# Altium PCB MiniAB-Board.pcbdoc
Units mil, origin at the board's own origin, x right, y up, seen from the top; angles counter-clockwise.
Board outline 2008.59 x 1417.04 mil, 2 copper layers (Top Layer, Bottom Layer); 14 components, 27 nets, 54 pads, 16 vias.
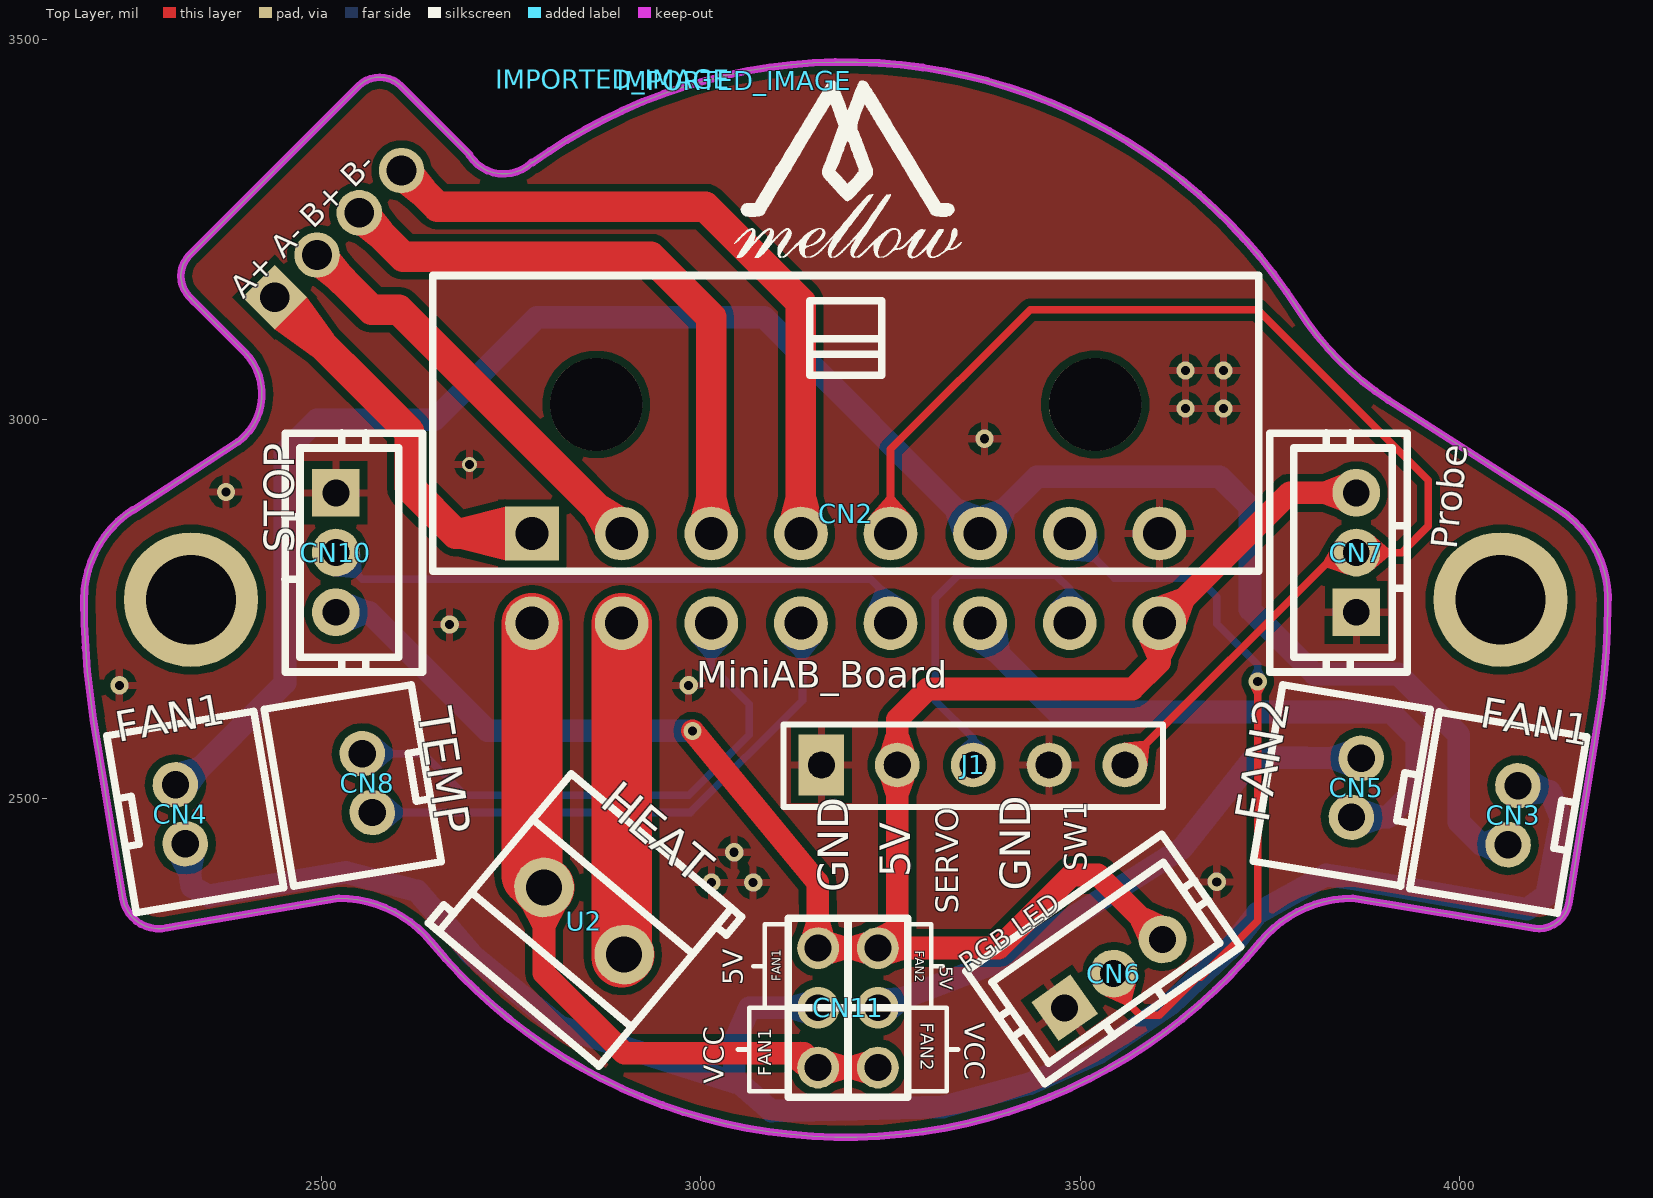
[diagram p0: Top Layer view]
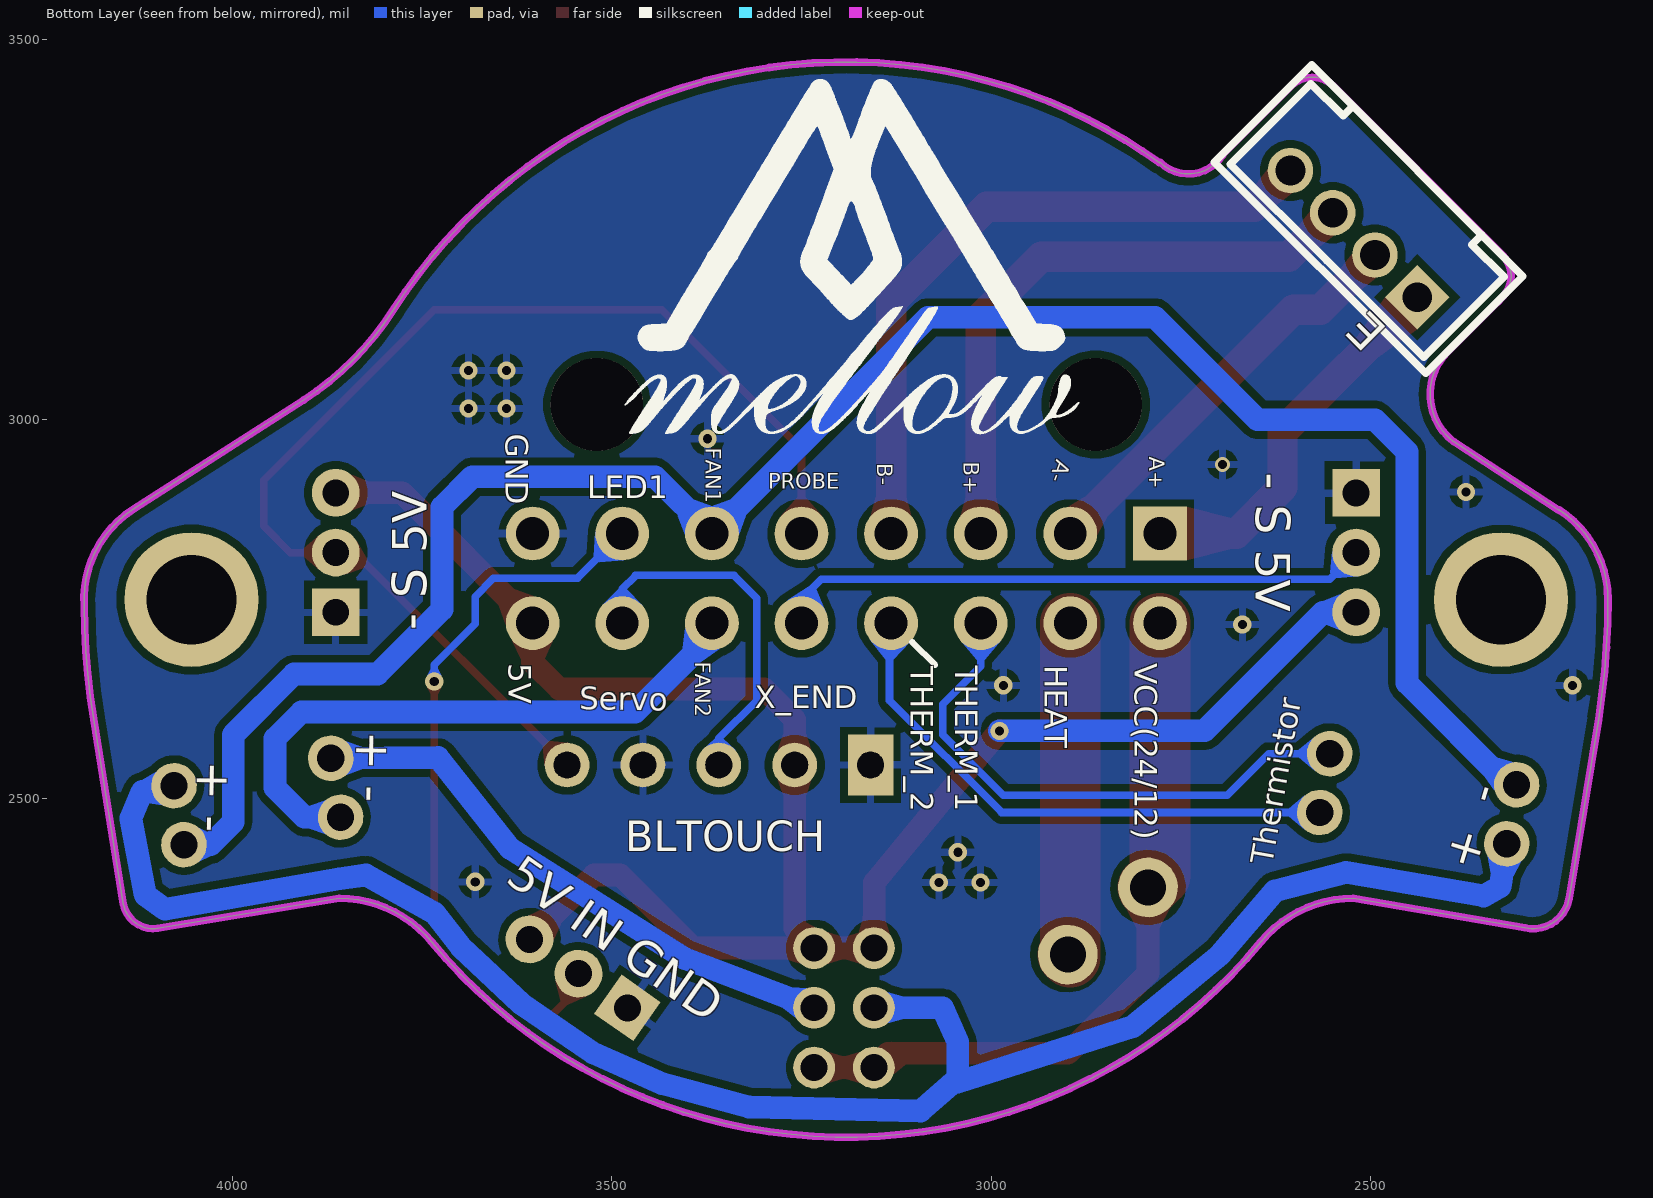
[diagram p1: Bottom Layer view, seen from below]

## Layer stack, top to bottom
Top Solder: solder mask 0.4, Solder Resist, Dk 3.5
Top Layer: signal copper 1.4
Dielectric1: dielectric 12.6, FR-4, Dk 4.8
Bottom Layer: signal copper 1.4
Bottom Solder: solder mask 0.4, Solder Resist, Dk 3.5

## Board outline
2238.25,2368.3 2199.48,2604.62 cw(c3191.01,2761.98) 2187.07,2762 cw(c2328,2762.01) 2251.59,2880.43 2252,2880 2390,2970 2391.18,2970.64 ccw(c2342.79,3032.76) 2398.46,3088.44 2332.67,3153.88 2326.29,3160.61 cw(c2354.13,3188.45) 2326.29,3216.29 2549,3439 cw(c2576.84,3411.16) 2604.68,3439 2695.57,3348.1 2695.12,3347.82 ccw(c2740,3376) 2777.45,3338.49 2778.14,3337.8 cw(c3190,2762) 2896,3406 2896.98,3406.79 cw(c3191,2762) 3788.03,3143.77 ccw(c4119.7,3355.89) 3906.27,3025.06 4130.84,2881.1 cw(c4053.99,2762) 4195.51,2754.13 cw(c3191.03,2762) 4183.12,2604.52 4143.75,2360.43 cw(c4104.03,2368.73) 4098.3,2328.56 3859.13,2368.3 ccw(c3859.13,2210.82) 3737.65,2311.03 cw(c3191,2762) 2644.35,2311.03 ccw(c2522.87,2210.82) 2522.87,2368.3 2296.46,2329.31 cw(c2285.92,2376.52)

## Design rules (kind name [scope] priority, off if disabled: settings)
Clearance [All] p1: gap=10 ignorepadtopadclearanceinfootprint=FALSE except(0: Arc-Hole Track-Hole SMDPad-Hole THPad-Hole Via-Hole Fill-Hole Poly-Hole Region-Hole Text-Hole)
PolygonConnect [All] p1: connectstyle=Relief reliefconductorwidth=10 reliefentries=4 polygonreliefangle="90 Angle" airgapwidth=10
RoutingVias [All] p1: holewidth=28 width=50 viastyle="Through Hole" minholewidth=28 minwidth=50 maxholewidth=28 maxwidth=50
SolderMaskExpansion [All] p1: expansion=4 istentingtop=FALSE
Width [All] p1: maxlimit=10 minlimit=10 preferedwidth=10
30 further rules are at their usual default settings.

## Components (designator, comment, footprint, x,y, rotation, side; value= is the part's Value field where it differs from the comment)
CN2 "M3025R-2X8P" CONN-TH_M3025R-2X8P 3190.97,2789.99 r180 top
CN3 "PH-2AK" CONN-TH_PH-2A 4070.49,2477.81 r80.5 top
CN4 "PH-2AK" CONN-TH_PH-2A 2314,2479 r279.5 top
CN5 "PH-2AK" CONN-TH_PH-2A 3864,2514 r80.5 top
CN6 "PH-3A" CONN-TH_3P-P2.00_PH-3AK 3544,2269 r35 top
CN7 "PH-3A" CONN-TH_3P-P2.00_PH-3AK 3863.96,2824 r90 top
CN8 "PH-2AK" CONN-TH_PH-2A 2560.45,2520.2 r99.5 top
CN10 "PH-3A" CONN-TH_3P-P2.00_PH-3AK 2518.96,2824 r270 top
CN11 "A2005WV-2X3P COPY" HDR-TH_6P-P2.00-V-M-R2-C3-S2.00 3194,2224 r90 top
E "PH-4AK" CONN-TH_PH-4AK 2522,3244 r225 bottom
IMPORTED_IMAGE "Comment" IMPORTED_IMAGE 2884.24,3447.72 r0 top
IMPORTED_IMAGE "Comment" IMPORTED_IMAGE 3044.21,3445.87 r0 top
J1 "2.54-5P单排直针" ? 3159,2544 r0 top
U2 "KF350-3.5-2P" CONN-TH_P3.50_KF350-3.5-2P 2846.2,2338.3 r320 top

## Footprints (in the part's own frame and the unit in brackets; to place one, negate y for a bottom-side part, rotate by r counter-clockwise, add the part's x,y. Pads: shape width x height; smd on the part's side, far side on the other; paste and mask are expansions set on the pad)
CONN-TH_3P-P2.00_PH-3AK [mm]
  rect 1.6x1.6 hole 0.9: 1(-2,0)
  round 1.6 hole 0.9: 2(0,0) 3(2,0)
  silkscreen extent -4.01,-1.71 4.01,2.9
CONN-TH_M3025R-2X8P [mm]
  rect 1.8x1.8 hole 1.1: 1(10.5,-1.5)
  round 1.8 hole 1.1: 2(7.5,-1.5) 3(4.5,-1.5) 4(1.5,-1.5) 5(-1.5,-1.5) 6(-4.5,-1.5) 7(-7.5,-1.5) 8(-10.5,-1.5) 9(10.5,1.5) 10(7.5,1.5) 11(4.5,1.5) 12(1.5,1.5) 13(-1.5,1.5) 14(-4.5,1.5) 15(-7.5,1.5) 16(-10.5,1.5)
  round 3.1 hole 3.1 unplated: ""(-8.35,-5.82) ""(8.35,-5.82)
  silkscreen extent -13.83,-10.14 13.83,-0.24
CONN-TH_P3.50_KF350-3.5-2P [mm]
  round 2 hole 1.2: 1(-1.75,0) 2(1.75,0)
  silkscreen extent -3.95,-3.4 3.95,3.5
CONN-TH_PH-2A [mil]
  round 60 hole 36: 1(-39.35,0) 2(39.35,0)
  silkscreen extent -118,-79 118,118
CONN-TH_PH-4AK [mil]
  rect 60x60 hole 39.37: 1(118.11,0)
  round 60 hole 39.37: 2(39.37,0) 3(-39.37,0) 4(-118.11,0)
  silkscreen extent -197,-63 197,118
HDR-TH_6P-P2.00-V-M-R2-C3-S2.00 [mm]
  round 1.4 hole 0.9: 1(-2,-1) 2(-2,1) 3(0,-1) 4(0,1) 5(2,-1) 6(2,1)
  silkscreen extent -3,-2 3,2
IMPORTED_IMAGE [mil]
? [mm]
  rect 1.524x2.032 hole 0.889 slot 0.894 at 90 deg: 1(0,0)
  round 1.5 hole 0.889 slot 0.894 at 0 deg: 2(2.54,0) 3(5.08,0) 4(7.62,0) 5(10.16,0)
  silkscreen extent -1.27,-1.41 11.43,1.36

## Free pads (board coordinates)
  round 177.16 hole 118.11: 3(2328.02,2761.91) 3(4054,2761.91)

## Via types
v1: diameter 24, hole 12, Top Layer to Bottom Layer, 15 vias
v2: diameter 19.68, hole 11.81, Top Layer to Bottom Layer, tented both sides, 1 vias

## Nets (pads, with @x,y where several pads share a name; then routed paths per layer and width w, separated by ;. In a path a pad name is that pad's centre, name@x,y a point inside that pad or via, vN(x,y) a via of type N, cw(c..) or ccw(c..) an arc to the next point about the centre after c; other vN are vias at no path point)
5V: CN2.16 CN6.3 CN7.3 CN10.3 CN11.5 CN11.6 J1.2 | length 2480
  Top Layer w30: v1(2989,2589) 3154,2389 CN11.6 ; CN11.6 CN11.5 ; CN6.3 3523.66,2399 3489,2399 3392.74,2302.74 CN11.5 ; CN7.3 3776.2,2902.7 CN2.16 3604.4,2679.4 3569,2644 3299,2644 3259,2604 J1.2 3259,2328.37 CN11.5
  Bottom Layer w30: CN10.3 2562.7,2745.3 2719,2589 v1(2989,2589)
A+: CN2.1 E.1 | length 510.9
  Top Layer w40: E.1 2616,2983 2616,2910 2677,2849 CN2.1
A-: CN2.2 E.2 | length 554.3
  Top Layer w40: E.2 2566.32,3144 2602,3144 2895.7,2850.3 CN2.2
B+: CN2.3 E.3 | length 806.2
  Top Layer w40: E.3 2607.68,3214 2934,3214 3013.8,3134.2 CN2.3
B-: CN2.4 E.4 | length 903.3
  Top Layer w40: E.4 2653.04,3280 3006,3280 3131.92,3154.08 CN2.4
FAN1: CN2.6 CN3.1 CN4.1 | length 2686.9
  Bottom Layer w30: CN4.1 2317.8,2517.8 2452,2652 2452,2957 2494,2999 2649,2999 2784,3134 3083.2,3134 CN2.6 3443.1,2924 3684,2924 3724,2884 3724,2749 3809,2664 3919,2664 3999,2584 3999,2469 4029,2439 CN3.1
FAN1_S: CN3.2 CN4.2 CN11.4 | length 2431
  Bottom Layer w30: CN4.2 2329,2384 2351.1,2371.4 2532.7,2402.5 2626.4,2377.8 2698.2,2294.1 2813.1,2199.4 3044,2125.9 ; CN11.4 3064,2224 3044,2179 3044,2130.9 3093.1,2088 3319.2,2093.1 3434,2124 3524,2164 3619,2229 3699,2304 3734,2349 3824,2399 3859,2394 4089,2354 4115,2372.6 4134,2474 4119,2509 CN3.2
FAN2: CN2.14 CN5.1 | length 815.8
  Bottom Layer w30: CN2.14 3368.1,2714.9 3469,2614 3909,2614 3944,2579 3944,2514 3905.2,2475.2 CN5.1
FAN2_S: CN5.2 CN11.3 | length 749
  Bottom Layer w30: CN11.3 3404,2289 3634,2434 3729,2554 CN5.2
GND: CN2.8 CN6.1 CN7.1 CN10.1 J1.1 J1.4
  other v1: 3014,2389 3069,2389 3680,2390 3044,2429 2234,2649 2984,2649 2669,2729 2374,2904 3374,2974 3639,3014 3689,3014 3639,3064 3689,3064
  other v2: 2695,2940
HEAT_GND: CN2.10 U2.2 | length 444.9
  Top Layer w80: CN2.10 2895.7,2290.7 U2.2
LED1: CN2.7 CN6.2 | length 953.8
  Top Layer w10: CN6.2 3544,2249 3579,2214 3604,2214 3654,2264 3659,2264 3734,2339 v1(3734,2654)
  Bottom Layer w10: CN2.7@3486.25,2849.04 3545.29,2790 3656,2790 3680,2766 3680,2730 3734,2676 v1(3734,2654)
S$6483: 
S$6489: 
S$6589: 
S$9736: 
S$9868: 
S$9889: 
S$9932: 
S$9934: 
S$10107: 
SERVO: CN2.15 J1.3 | length 483.3
  Bottom Layer w10: J1.3 3359,2579 3309,2629 3309,2764 3339,2794 3469,2794 3469,2793 3486,2776 CN2.15
SW1: CN2.5 CN7.2 J1.5 | length 1579.9
  Top Layer w10: CN2.5 3250,2960 3434,3144 3734,3144 3959,2919 3959,2859 3924,2824 3839,2824 J1.5
SW2: CN2.13 CN10.2 | length 788.4
  Bottom Layer w10: CN10.2 2554,2789 3224,2789 3250,2763 CN2.13
THERM_1: CN2.11 CN8.2 | length 753.8
  Bottom Layer w10: CN8.2 2634,2559 2689,2504 2984,2504 3064,2584 3064,2624 3013.8,2674.2 CN2.11 CN2.11@3034,2730.9
THERM_2: CN2.12 CN8.1 | length 731
  Bottom Layer w10: CN8.1 2986.4,2481.4 3134,2629 3134,2728.9 CN2.12
VCC: CN2.9 CN11.1 CN11.2 U2.1 | length 959.4
  Top Layer w30: U2.1 2793.4,2269.6 2899,2164 3135.89,2164 CN11.2 ; CN11.2 CN11.2 ; CN11.1 CN11.2
  Top Layer w80: CN2.9 2777.59,2398.42 U2.1
pads on no net: CN2.

## Polygon pours and split planes (outlines as drawn)
GND on Bottom Layer "Bottom Layer-GND" (solid, remove dead copper, pour order 0): 1982,3732 4536,3732 4538,3734 4538,1824 1992,1824 1982,1834
GND on Top Layer "Top Layer-GND" (solid, remove dead copper, pour order 1): 2086,3612 4370,3612 4374,3616 4374,1996 4372,1994 2090,1994 2086,1998

## Keep-outs
Keep-Out Layer:
  lines w10: 2199.48,2604.62 cw(c3191,2761.98) 2187.07,2762 cw(c2328,2762) 2251.59,2880.43 ; 2238.25,2368.3 ccw(c2285.92,2376.52) 2296.46,2329.31 ; 2326.29,3160.61 cw(c2354.13,3188.45) 2326.29,3216.29 ; 2391.18,2970.64 ccw(c2342.79,3032.76) 2398.46,3088.44 ; 2522.87,2368.3 cw(c2522.87,2210.82) 2644.35,2311.03 ccw(c3191,2762) 3737.65,2311.03 cw(c3859.13,2210.82) 3859.13,2368.3 ; 2549,3439 cw(c2576.84,3411.16) 2604.68,3439 ; 2695.12,3347.81 ccw(c2740,3376) 2777.45,3338.5 ; 2778.14,3337.8 cw(c3190,2762) 2896,3406 ; 2896.98,3406.79 cw(c3191,2762) 3788.03,3143.77 ccw(c4119.7,3355.89) 3906.27,3025.06 ; 4098.3,2328.56 ccw(c4104.03,2368.73) 4143.75,2360.43 ; 4130.84,2881.1 cw(c4053.99,2762) 4195.51,2754.13 cw(c3191,2762) 4183.12,2604.52

## Other copper
Top Layer:
  region net A-: 2492.28,3186.22 2524.1,3218.04 2537.18,3201.42 2508.9,3173.14
  region net B+: 2547.96,3241.9 2579.78,3273.72 2592.86,3257.1 2564.58,3228.82
  region net B-: 2603.64,3297.58 2635.46,3329.4 2648.54,3312.78 2620.26,3284.5
  region net 5V: 3281.15,2524.47 3236.85,2524.47 3244,2503.8 3274,2503.8
  region net 5V: 3281.15,2563.53 3236.85,2563.53 3244,2584.2 3274,2584.2
  region net SW1: 3557.15,2573.47 3588.47,2542.15 3590.96,2568.89 3583.89,2575.96
  region net 5V: 3175.16,2321.13 3133.82,2320.81 3139.34,2340.14 3169.34,2340.38
  region net 5V: 3172.86,2282.07 3172.86,2323.41 3192.15,2317.74 3192.15,2287.74
  region net 5V: 3231.64,2330.25 3260.88,2301.01 3269.61,2317.76 3248.39,2338.98
  region net 5V: 3215.14,2282.07 3215.14,2323.41 3195.85,2317.74 3195.85,2287.74
  region net 5V: 3251.6,2282.07 3251.6,2323.41 3270.89,2317.74 3270.89,2287.74
  region net VCC: 3172.86,2124.59 3172.86,2165.93 3192.15,2160.26 3192.15,2130.26
  region net VCC: 3149.16,2172.27 3128.51,2136.46 3113.48,2149 3130.77,2179
  region net VCC: 3215.14,2124.59 3215.14,2165.93 3195.85,2160.26 3195.85,2130.26
  region net VCC: 2822.94,2356.52 2763.89,2356.56 2778.4,2328.99 2808.4,2328.97
  region net A-: 2898.57,2884.36 2860.3,2847.47 2847.82,2869.89 2876.63,2897.65
  region net B+: 3040.38,2872.48 2987.23,2872.47 2993.8,2897.27 3033.8,2897.28
  region net B-: 3158.49,2872.48 3105.35,2872.48 3111.92,2897.28 3151.92,2897.28
  region net SW1: 3276.59,2872.49 3223.44,2872.46 3245,2897.28 3255,2897.28
  region net 5V: 3602.18,2766.3 3639.72,2728.67 3649.1,2754.39 3627.91,2775.62
  region net 5V: 3630.95,2707.52 3577.8,2707.47 3589.4,2682.68 3619.4,2682.7
  region net 5V: 3843.15,2879.1 3843.11,2926.34 3821.07,2917.7 3821.09,2887.7
  region net SW1: 3884.79,2800.38 3884.79,2847.62 3906.84,2829 3906.84,2819
  region net SW1: 3852.82,2794.54 3836.12,2838.74 3821.91,2813.98 3825.79,2803.72
  region net 5V: 3577.07,2312.19 3610.47,2345.6 3588.79,2355.09 3567.57,2333.88
  region net LED1: 3574.33,2260.49 3531.77,2239.98 3557.85,2228.08 3567.39,2232.68
  region net LED1: 3725,2646.06 3743,2646.06 3739,2637.66 3729,2637.66
  region net A+: 2438.5,3118.1 2480.9,3160.5 2516.25,3111 2487.96,3082.71
  region net A+: 2742.16,2813.61 2742.16,2884.47 2682.16,2869 2682.16,2829
Bottom Layer:
  region net SERVO: 3381.15,2563.53 3336.85,2563.53 3354,2579 3364,2579
  region net FAN1_S: 3136.4,2203.33 3136.4,2244.67 3117.11,2239 3117.11,2209
  region net FAN2_S: 3257.76,2211.17 3243.05,2249.8 3263.09,2251.37 3273.77,2223.34
  region net FAN1: 2336.64,2510.62 2311,2547.61 2332.39,2553.61 2349.76,2528.55
  region net FAN1_S: 2301.22,2417.2 2345.71,2423.94 2341.44,2402.05 2311.78,2397.56
  region net FAN2: 3877.36,2452.69 3877.35,2497.69 3898.35,2490.2 3898.36,2460.2
  region net FAN2_S: 3850.84,2575.48 3850.46,2530.48 3829.52,2538.15 3829.77,2568.15
  region net THERM_2: 2586.8,2458.89 2586.79,2503.89 2607.79,2486.4 2607.79,2476.4
  region net THERM_1: 2573.81,2581.51 2573.8,2536.51 2594.8,2554 2594.81,2564
  region net FAN1: 3332.78,2846.82 3370.36,2884.4 3344.64,2893.76 3323.42,2872.54
  region net FAN1: 3365.92,2884.4 3403.5,2846.82 3412.86,2872.54 3391.64,2893.76
  region net LED1: 3484.03,2813.68 3521.61,2851.26 3523.9,2818.46 3516.83,2811.39
  region net THERM_2: 3106.38,2706.37 3159.48,2708.66 3139,2682.95 3129,2682.52
  region net SW2: 3268.6,2761.11 3217.77,2745.58 3230.52,2775.41 3241.35,2778.72
  region net FAN2: 3403.03,2724.76 3357.65,2697.09 3380.08,2681.71 3406.43,2697.78
  region net SERVO: 3512.69,2754.52 3459.55,2754.22 3481,2775.97 3491,2776.03
  region net THERM_1: 3040.38,2707.48 2987.24,2707.51 3008.8,2682.69 3018.8,2682.69
  region net 5V: 2539.82,2721.66 2539.77,2768.9 2561.83,2760.3 2561.85,2730.3
  region net SW2: 2517.01,2792.56 2550.39,2825.99 2552.83,2797.24 2545.77,2790.16
  region net FAN1: 4044.16,2416.5 4044.16,2461.5 4029,2454 4029,2424
  region net FAN1_S: 4100.53,2535.22 4092.5,2490.94 4114.5,2494.57 4119.85,2524.09
  region net LED1: 3725,2661.94 3743,2661.94 3739,2670.34 3729,2670.34

## Silkscreen, mask and mechanical layers (free items; w line width, h text height)
Top Overlay:
  lines w6: 3049,2169 3064,2169 ; 3069,2279 3084,2279 ; 3114,2144 3114,2114 3064,2114 3064,2224 3084,2224 ; 3114,2224 3084,2224 ; 3114,2304 3114,2334 3084,2334 3084,2224 ; 3274,2144 3274,2114 3324,2114 3324,2224 3304,2224 ; 3274,2224 3304,2224 ; 3274,2304 3274,2334 3304,2334 3304,2224 ; 3304,2279 3319,2279 ; 3324,2169 3339,2169
  lines w10: 3114,2224 3274,2224
  text "A+ A- B+ B-" at 2396.61,3157.39 h30 r45
  text "Probe" at 3996.4,2827.17 h35 r84
  text "STOP" at 2464,2824 h40 r90
  text "MiniAB_Board" at 2994,2634 h60
  text "TEMP" at 2626.78,2615.48 h45 r279
  text "FAN1" at 4025.53,2594.3 h40 r350
  text "FAN1" at 2232.47,2574.3 h40 r10
  text "HEAT" at 2864.54,2491.76 h45 r320
  text "FAN2" at 3748.16,2466.09 h45 r80
  text "SW1" at 3509,2404 h30 r90
  text "5V" at 3276,2396 h40 r90
  text "GND" at 3434,2378 h40 r90
  text "GND" at 3194,2376 h40 r90
  text "SERVO" at 3339,2348 h30 r90
  text "FAN2" at 3279,2299 h20 r270
  text "5V" at 3309,2279 h30 r270
  text "RGB LED" at 3351.17,2269.76 h25 r35
  text "FAN1" at 3109,2259 h20 r90
  text "5V" at 3064,2254 h45 r90
  text "FAN2" at 3284,2204 h30 r270
  text "VCC" at 3339,2204 h45 r270
  text "FAN1" at 3099,2134 h30 r90
  text "VCC" at 3039,2124 h45 r90
Bottom Overlay:
  lines w8: 3074,2676 3104,2706
  text "GND" at 3639.71,2980.29 h30 r90
  text "FAN1" at 3376,2962 h20 r90
  text "A+" at 2792,2950 h20 r90
  text "A-" at 2913.4,2947.42 h20 r110
  text "B+" at 3036,2944 h20 r90
  text "B-" at 3150,2942 h20 r90
  text "- S 5V" at 2651.5,2929 h45 r90
  text "PROBE" at 3294,2908 h20
  text "LED1" at 3532.23,2895.38 h30
  text "- S 5V" at 3743.78,2721.46 h45 r270
  text "FAN2" at 3390.06,2680.29 h20 r90
  text "VCC(24/12)" at 2811,2678 h30 r90
  text "5V" at 3635.71,2678.29 h30 r90
  text "HEAT" at 2929.11,2675.5 h30 r90
  text "THERM_1" at 3047.41,2674.89 h30 r90
  text "THERM_2" at 3105.71,2674.29 h30 r90
  text "X_END" at 3311.91,2618.86 h30
  text "Servo" at 3543.1,2617.38 h30 r1
  text "+ -" at 3836.5,2589.39 h45 r91
  text "+ -" at 4046.5,2549.39 h45 r91
  text "BLTOUCH" at 3482,2430 h40
  text "Thermistor" at 2629.23,2411.4 h30 r280
  text "+  -" at 2362.48,2402.42 h45 r287
  text "5V IN GND" at 3641.91,2390.57 h45 r35
Document:
  lines w8: 1504,2385.1 1704,2385.1 ; 1696.55,3462 1696.55,3656 ; 1724,2386.4 1924,2386.4 ; 1726,2857.6 1922,2857.6 ; 1726,3022.4 1922,3022.4 ; 1768,3656 1512,3656 1512,3462 2368,3462 2368,3652 1770,3656 ; 1907.07,3462 1907.07,3655.08 ; 2125.52,3462 2125.52,3653.62 ; 2202,4108.8 4194,4108.8 ; 2202,4391 2202,3823 4194,3823 4194,4393 2202,4393 ; 2431.7,3823 2431.7,4393 ; 2673.81,3823 2673.81,4393 ; 2744,1504 2744,1704 ; 2918.54,3823 2918.54,4393 ; 3171.72,3823 3171.72,4393 ; 3204,1764 3204,1934 ; 3374,1764 3374,1934 ; 3426.44,3823 3426.44,4393 ; 3564,1764 3564,1934 ; 3614,1504 3614,1700 ; 3689.6,3823 3689.6,4393 ; 3744,1764 3744,1934 ; 3864,1504 3864,1700 ; 3936.97,3823 3936.97,4393 ; 4464,2396.39 4664,2396.39 ; 4466,2867.6 4662,2867.6 ; 4466,3032.41 4662,3032.41 ; 4684,2395.06 4884,2395.06 ; 1504,2244 1704,2244 1704,2544 1504,2544 1504,2244 ; 1724,2244 1924,2244 1924,2544 1724,2544 1724,2244 ; 1726,2692 1922,2692 1922,3176 1898,3176 1726,3176 1726,2692 ; 2594,1504 2894,1504 2894,1704 2594,1704 2594,1504 ; 3054,1764 3924,1764 3924,1934 3054,1934 3054,1764 ; 3424,1506 4004,1506 4004,1702 3424,1702 3424,1678 3424,1506 ; 4464,2254 4464,2554 4664,2554 4664,2254 4464,2254 ; 4466,2702 4466,3186 4490,3186 4662,3186 4662,2702 4466,2702 ; 4684,2254 4684,2554 4884,2554 4884,2254 4684,2254
  text "FAN1" at 3454,4219 h70
  text "LED1" at 3714,4216 h70
  text "SW1" at 3200,4215 h80
  text "A-" at 2460.32,4162.41 h80 r340
  text "A+" at 2248,4160 h80
  text "-" at 3564,4154 h80 r90
  text "GND" at 3962,4151 h80
  text "B-" at 2974,4150 h80
  text "B+" at 2730,4148 h80
  text "Neopixel" at 3704.35,4133 h40 r1
  text "Probe" at 3204,4124 h50
  text "Heat / GND" at 2472,3939 h60
  text "FAN2" at 3444,3939 h70
  text "Thermistor" at 2682,3930 h30
  text "Thermistor" at 2930,3928 h30
  text "SW2" at 3188,3925 h80
  text "Servo" at 3716,3904 h50
  text "VCC" at 2234,3891 h60
  text "EndStop" at 3188.6,3869.05 h40 r356
  text "5V" at 4006,3869 h80
  text "-" at 3564,3864 h80 r90
  text "A+" at 1536,3480 h80
  text "B-" at 2190,3478 h80
  text "A-" at 1720.32,3476.41 h80 r340
  text "B+" at 1960,3476 h80
  text "5V" at 4514,3044 h60
  text "GND" at 1750,3034 h60
  text "SW1" at 4494,2914 h60
  text "SW2" at 1742,2906 h60
  text "EndStop" at 1742.95,2871.04 h30 r356
  text "Probe" at 4484,2864 h40
  text "GND" at 4484,2714 h60
  text "5V" at 1774,2710 h60
  text "FAN2" at 4504,2474 h40
  text "FAN1" at 4724,2474 h40
  text "FAN1" at 1544,2464 h40
  text "Thermistor" at 1734,2442.5 h23
  text "+" at 4526.32,2441.68 h50 r225
  text "+" at 4736.32,2441.68 h50 r225
  text "-" at 1609,2414 h50 r90
  text "FAN2" at 4504,2314 h40
  text "FAN1" at 4724,2314 h40
  text "FAN1" at 1544,2304 h40
  text "Thermistor" at 1734,2292.5 h23
  text "+" at 1566.32,2281.68 h50 r225
  text "-" at 4569,2274 h50 r90
  text "-" at 4779,2274 h50 r90
  text "SW1" at 3774,1839 h50
  text "Servo" at 3394,1804 h40
  text "GND" at 3064,1799 h50
  text "5V" at 3254,1799 h50
  text "GND" at 3584,1789 h50
  text "Probe" at 3754,1774 h40
  text "Heat" at 2614,1604 h40
  text "Heat" at 2764,1604 h40
  text "LED1" at 3654,1574 h60
  text "+" at 2776.32,1561.68 h50 r225
  text "-" at 2669,1544 h50 r90
  text "GND" at 3444,1544 h60
  text "5V" at 3884,1544 h60
  text "Neopixel" at 3654.26,1529 h30 r1